# Altium PCB R45_PCBM.PcbDoc (part 2 of 8)
Units mm, origin at the board's own origin, x right, y up, seen from the top; angles counter-clockwise.
Board outline 109 x 109 mm, 4 copper layers (Top Layer, Layer 1, Layer 2, Bottom Layer), stack 0.98 mm thick; 9 components, 0 nets, 14 pads, 1504 vias.
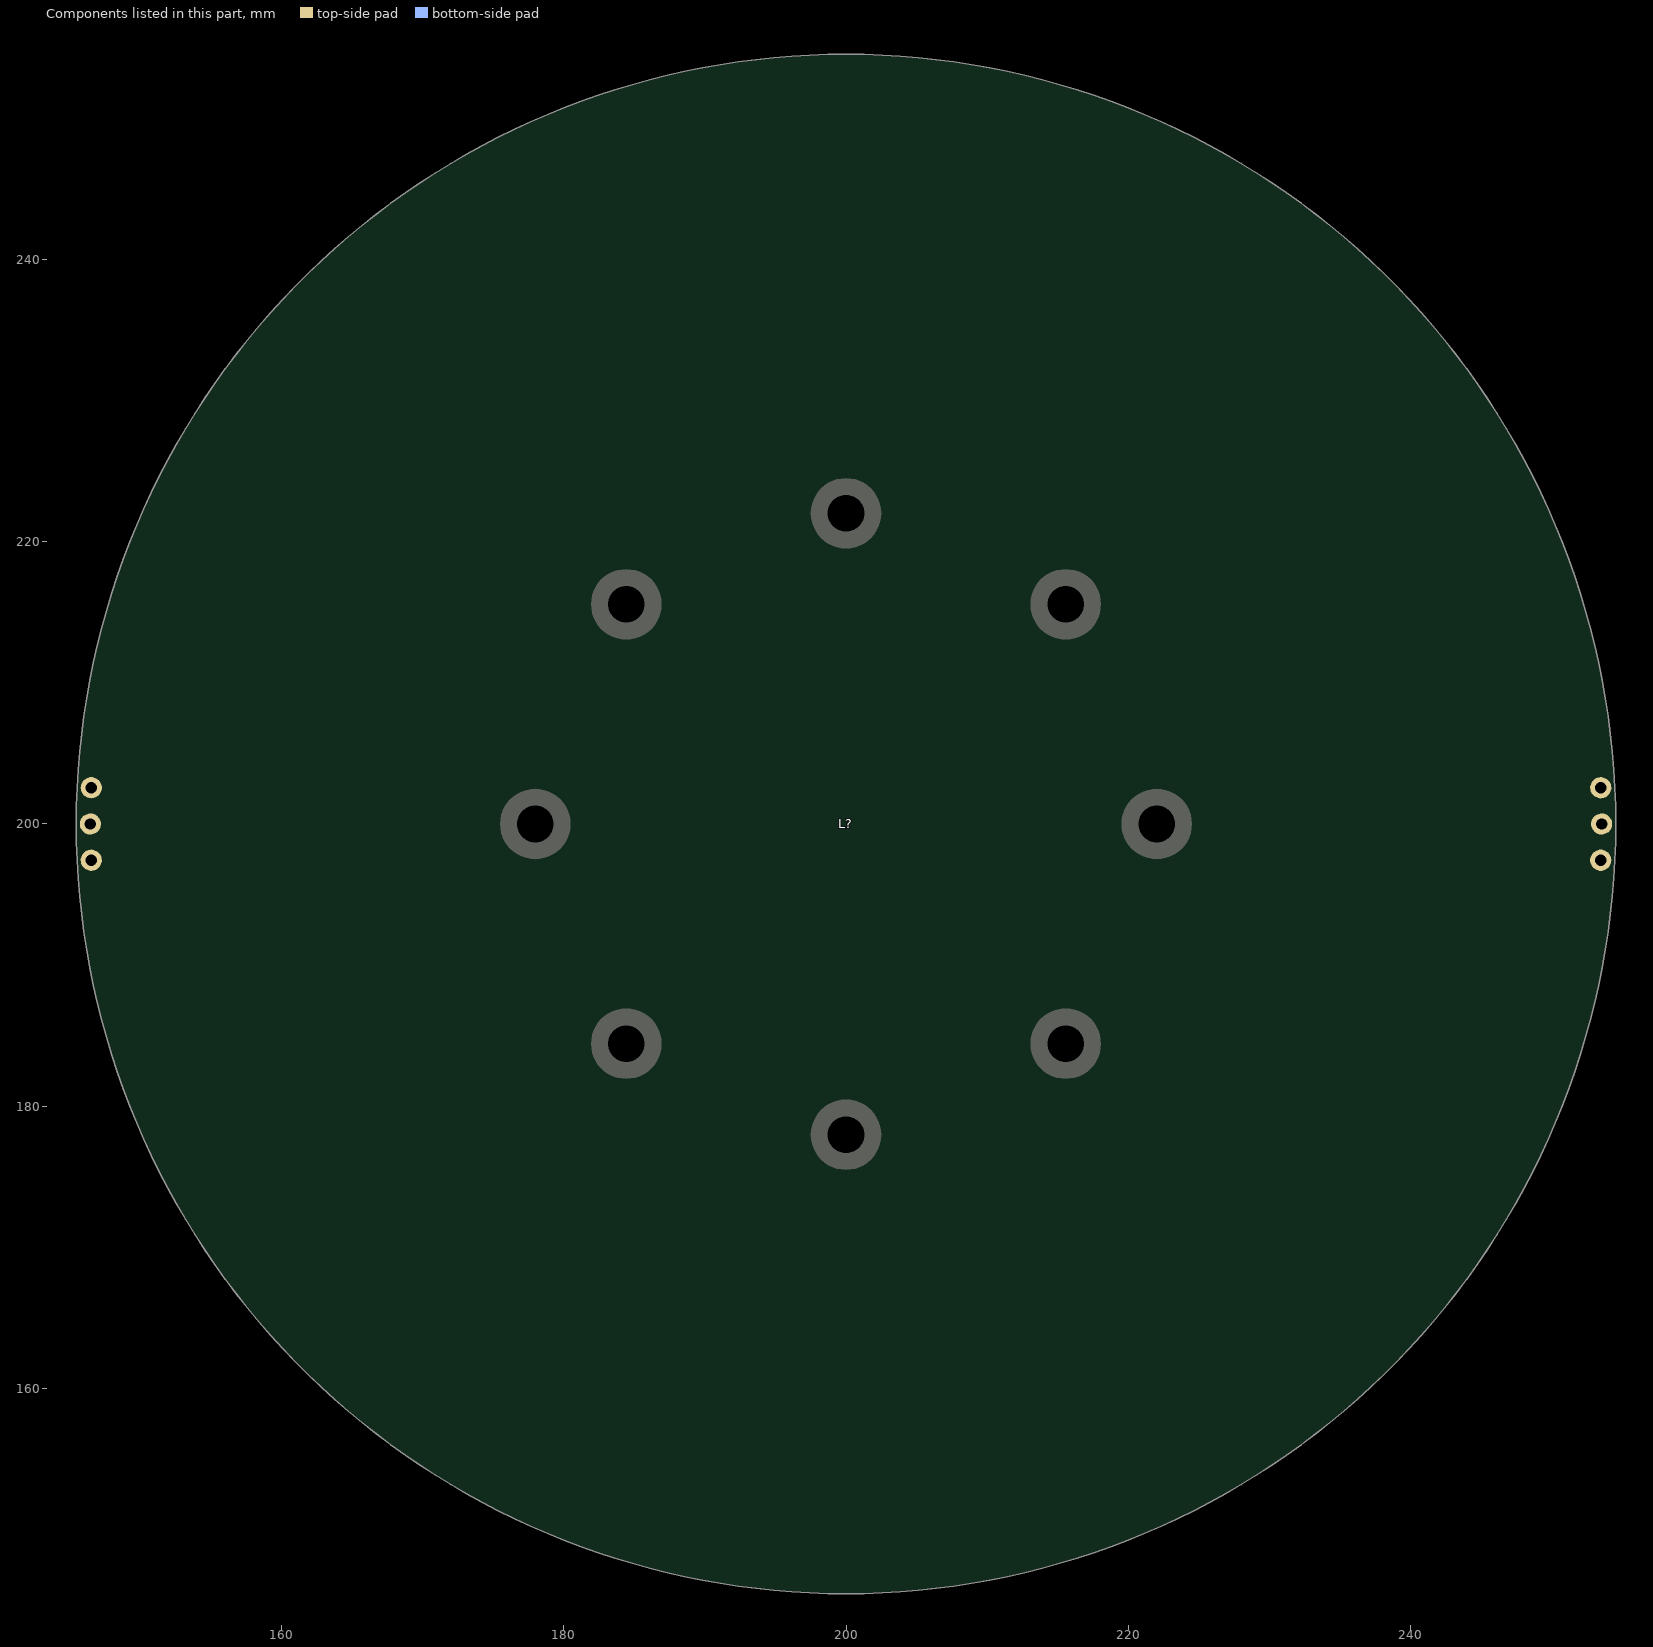
[diagram p4: the components of this part, seen from the top]

## Footprints (in the part's own frame and the unit in brackets; to place one, negate y for a bottom-side part, rotate by r counter-clockwise, add the part's x,y. Pads: shape width x height; smd on the part's side, far side on the other; paste and mask are expansions set on the pad) (continued)
R45_stator [mm]
  round 1.5 hole 0.8 paste-2539.97 mask+0.102: A(53.385,-3.499) A'(-53.386,3.499) B(53.492,-0.934) B'(-53.492,0.934) C(53.475,1.634) C'(-53.476,-1.634)
  Top Layer region: -34.464,30.464 -34.494,30.413 -34.502,30.355 -34.487,30.298 -34.451,30.251 -34.451,30.251 -21.846,19.3 -21.81,19.253 -21.795,19.197 -21.802,19.139 -21.831,19.088 -21.831,19.088 -21.94,18.962 -21.987,18.926 -22.043,18.911 -22.101,18.918 -22.152,18.947 -22.152,18.947 -34.751,29.906 -34.802,29.935 -34.861,29.942 -34.918,29.926 -34.964,29.889 -34.964,29.889 -35.506,29.243 -35.535,29.191 -35.541,29.132 -35.524,29.075 -35.486,29.03 -35.486,29.03 -21.799,17.953 -21.73,17.921 -21.654,17.928 -21.591,17.971 -21.591,17.971 -20.801,18.88 -20.767,18.948 -20.771,19.024 -20.812,19.088 -20.812,19.088 -33.686,31.1 -33.736,31.131 -33.795,31.14 -33.852,31.126 -33.9,31.091 -33.9,31.091
  Top Layer region: -30.464,34.464 -31.091,33.9 -31.126,33.852 -31.14,33.795 -31.131,33.736 -31.1,33.686 -31.1,33.686 -19.707,21.475 -19.642,21.435 -19.565,21.431 -19.497,21.466 -19.497,21.466 -19.311,21.634 -19.269,21.698 -19.264,21.775 -19.298,21.844 -19.298,21.844 -30.251,34.451 -30.298,34.487 -30.355,34.502 -30.413,34.494 -30.464,34.464
  Top Layer region: -32.794,32.255 -33.38,31.648 -33.412,31.599 -33.422,31.54 -33.409,31.483 -33.374,31.435 -33.374,31.435 -21.157,20.048 -21.09,20.012 -21.013,20.014 -20.947,20.054 -20.947,20.054 -20.773,20.234 -20.735,20.302 -20.736,20.378 -20.775,20.445 -20.775,20.445 -32.58,32.257 -32.629,32.29 -32.688,32.301 -32.745,32.289 -32.794,32.255
  Top Layer region: -35.986,28.65 -36.505,27.986 -36.532,27.933 -36.536,27.874 -36.517,27.818 -36.477,27.774 -36.477,27.774 -23.137,17.727 -23.066,17.698 -22.99,17.708 -22.929,17.755 -22.929,17.755 -22.774,17.952 -22.744,18.023 -22.753,18.099 -22.798,18.161 -22.798,18.161 -35.773,28.675 -35.826,28.702 -35.885,28.707 -35.941,28.689 -35.986,28.65
  Top Layer region: -31.648,33.38 -32.255,32.794 -32.289,32.745 -32.301,32.688 -32.29,32.629 -32.257,32.58 -32.257,32.58 -20.34,20.67 -20.239,20.519 -20.204,20.34 -20.239,20.162 -20.341,20.01 -20.341,20.01 -20.453,19.841 -20.49,19.64 -20.446,19.441 -20.328,19.275 -20.328,19.275 -20.277,19.228 -20.195,19.099 -20.188,18.948 -20.255,18.812 -20.255,18.812 -21.447,17.44 -21.573,17.354 -21.724,17.341 -21.863,17.403 -21.863,17.403 -21.917,17.447 -22.098,17.541 -22.301,17.557 -22.494,17.493 -22.647,17.358 -22.647,17.358 -22.782,17.236 -22.954,17.176 -23.136,17.187 -23.3,17.266 -23.3,17.266 -36.752,27.409 -36.806,27.434 -36.865,27.437 -36.92,27.417 -36.964,27.377 -36.964,27.377 -37.46,26.695 -37.484,26.641 -37.486,26.582 -37.465,26.527 -37.424,26.484 -37.424,26.484 -21.96,15.662 -21.892,15.636 -21.82,15.645 -21.761,15.686 -21.761,15.686 -18.562,19.366 -18.529,19.43 -18.53,19.503 -18.566,19.566 -18.566,19.566 -31.435,33.374 -31.483,33.409 -31.54,33.422 -31.599,33.412 -31.648,33.38
  Top Layer region: -29.243,35.506 -29.889,34.964 -29.926,34.918 -29.942,34.861 -29.935,34.802 -29.906,34.751 -29.906,34.751 -18.849,22.039 -18.759,21.881 -18.736,21.7 -18.784,21.525 -18.895,21.381 -18.895,21.381 -19.019,21.219 -19.07,21.022 -19.04,20.82 -18.934,20.646 -18.934,20.646 -18.036,19.684 -17.965,19.557 -17.963,19.412 -18.029,19.283 -18.029,19.283 -21.604,15.17 -21.723,15.086 -21.867,15.069 -22.003,15.121 -22.003,15.121 -23.08,15.876 -23.267,15.957 -23.471,15.959 -23.659,15.881 -23.802,15.736 -23.802,15.736 -23.929,15.605 -24.097,15.533 -24.279,15.531 -24.448,15.598 -24.448,15.598 -38.575,24.778 -38.63,24.8 -38.689,24.799 -38.743,24.775 -38.784,24.732 -38.784,24.732 -39.231,24.017 -39.251,23.961 -39.249,23.902 -39.224,23.849 -39.181,23.809 -39.181,23.809 -22.01,13.498 -21.944,13.477 -21.876,13.488 -21.82,13.528 -21.82,13.528 -16.434,19.725 -16.401,19.786 -16.4,19.855 -16.43,19.917 -16.43,19.917 -29.03,35.486 -29.075,35.524 -29.132,35.541 -29.191,35.535 -29.243,35.506
  Top Layer region: -37.897,26.07 -38.369,25.371 -38.391,25.317 -38.391,25.258 -38.368,25.203 -38.326,25.162 -38.326,25.162 -24.317,16.07 -24.244,16.046 -24.169,16.061 -24.111,16.112 -24.111,16.112 -23.971,16.32 -23.946,16.392 -23.96,16.468 -24.009,16.527 -24.009,16.527 -37.687,26.109 -37.741,26.133 -37.8,26.134 -37.855,26.112 -37.897,26.07
  Top Layer region: 15.335,-43.367 16.128,-43.078 16.178,-43.047 16.213,-43 16.227,-42.942 16.217,-42.884 16.217,-42.884 10.227,-27.294 10.182,-27.232 10.113,-27.2 10.036,-27.207 10.036,-27.207 9.8,-27.293 9.737,-27.337 9.704,-27.406 9.71,-27.483 9.71,-27.483 15.142,-43.275 15.172,-43.326 15.22,-43.361 15.277,-43.376 15.335,-43.367
  Top Layer region: 17.941,-45.68 17.883,-45.691 17.825,-45.678 17.777,-45.644 17.746,-45.594 17.746,-45.594 9.752,-24.752 9.743,-24.682 9.767,-24.615 9.819,-24.567 9.819,-24.567 15.631,-21.346 15.699,-21.327 15.768,-21.342 15.823,-21.387 15.823,-21.387 27.409,-36.752 27.434,-36.806 27.437,-36.865 27.417,-36.92 27.377,-36.964 27.377,-36.964 26.695,-37.46 26.641,-37.484 26.582,-37.486 26.527,-37.465 26.484,-37.424 26.484,-37.424 16.824,-23.621 16.693,-23.495 16.523,-23.429 16.341,-23.433 16.174,-23.506 16.174,-23.506 15.987,-23.588 15.784,-23.589 15.595,-23.511 15.453,-23.366 15.453,-23.366 15.187,-22.956 15.077,-22.856 14.933,-22.82 14.79,-22.857 14.79,-22.857 11.547,-24.655 11.439,-24.757 11.393,-24.898 11.42,-25.044 11.42,-25.044 11.627,-25.487 11.675,-25.685 11.641,-25.886 11.531,-26.058 11.363,-26.173 11.363,-26.173 11.213,-26.276 11.113,-26.428 11.079,-26.607 11.116,-26.785 11.116,-26.785 18.439,-44.023 18.505,-44.119 18.603,-44.184 18.718,-44.205 18.833,-44.181 18.833,-44.181 22.548,-42.406 26.097,-40.319 26.097,-40.319 26.181,-40.237 26.227,-40.13 26.229,-40.012 26.186,-39.904 26.186,-39.904 16.07,-24.317 16.046,-24.244 16.061,-24.169 16.112,-24.111 16.112,-24.111 16.32,-23.971 16.392,-23.946 16.468,-23.96 16.527,-24.009 16.527,-24.009 27.876,-40.208 27.9,-40.262 27.901,-40.321 27.879,-40.375 27.838,-40.418 27.838,-40.418 23.04,-43.332 17.941,-45.68
  Top Layer region: 18.92,-43.601 18.862,-43.613 18.804,-43.603 18.755,-43.571 18.722,-43.522 18.722,-43.522 11.603,-26.738 11.592,-26.662 11.62,-26.591 11.68,-26.543 11.68,-26.543 11.909,-26.441 11.985,-26.428 12.057,-26.455 12.106,-26.514 12.106,-26.514 19.33,-41.995 19.4,-42.089 19.5,-42.15 19.616,-42.168 19.73,-42.14 19.73,-42.14 21.844,-41.083 23.903,-39.921 23.903,-39.921 23.99,-39.842 24.04,-39.736 24.045,-39.619 24.006,-39.509 24.006,-39.509 15.058,-24.607 14.949,-24.501 14.802,-24.462 14.655,-24.499 14.655,-24.499 13.011,-25.411 12.901,-25.516 12.856,-25.661 12.889,-25.81 12.889,-25.81 20.61,-40.954 20.626,-41.01 20.619,-41.069 20.59,-41.121 20.542,-41.156 20.542,-41.156 19.785,-41.526 19.727,-41.541 19.669,-41.533 19.618,-41.502 19.583,-41.455 19.583,-41.455 11.965,-25.105 11.951,-25.032 11.974,-24.962 12.028,-24.911 12.028,-24.911 14.752,-23.401 14.824,-23.382 14.896,-23.4 14.95,-23.45 14.95,-23.45 25.612,-39.858 25.634,-39.913 25.633,-39.972 25.61,-40.026 25.567,-40.066 25.567,-40.066 22.313,-41.966 18.92,-43.601
  Top Layer region: 21.222,-40.81 21.966,-40.414 22.012,-40.377 22.04,-40.325 22.045,-40.266 22.027,-40.209 22.027,-40.209 13.926,-25.605 13.873,-25.55 13.8,-25.528 13.725,-25.545 13.725,-25.545 13.503,-25.663 13.447,-25.715 13.424,-25.789 13.44,-25.864 13.44,-25.864 21.018,-40.746 21.054,-40.792 21.106,-40.821 21.165,-40.827 21.222,-40.81
  Top Layer region: 27.986,-36.505 27.933,-36.532 27.874,-36.536 27.818,-36.517 27.774,-36.477 27.774,-36.477 17.727,-23.137 17.698,-23.066 17.708,-22.99 17.755,-22.929 17.755,-22.929 17.952,-22.774 18.023,-22.744 18.099,-22.753 18.161,-22.798 18.161,-22.798 28.675,-35.773 28.702,-35.826 28.707,-35.885 28.689,-35.941 28.65,-35.986 28.65,-35.986
  Top Layer region: 22.633,-40.045 23.363,-39.623 23.408,-39.584 23.434,-39.531 23.437,-39.472 23.417,-39.416 23.417,-39.416 14.812,-25.103 14.756,-25.05 14.682,-25.031 14.608,-25.051 14.608,-25.051 14.391,-25.176 14.336,-25.231 14.316,-25.304 14.334,-25.379 14.334,-25.379 22.427,-39.988 22.465,-40.033 22.518,-40.06 22.577,-40.064 22.633,-40.045
  Top Layer region: 7.572,-45.371 8.402,-45.224 8.458,-45.203 8.5,-45.162 8.523,-45.107 8.524,-45.048 8.524,-45.048 5.332,-28.655 5.299,-28.586 5.236,-28.543 5.159,-28.536 5.159,-28.536 4.912,-28.58 4.842,-28.612 4.798,-28.675 4.79,-28.751 4.79,-28.751 7.398,-45.247 7.418,-45.302 7.459,-45.345 7.513,-45.369 7.572,-45.371
  Top Layer region: 1.235,-49.061 1.177,-49.051 1.128,-49.02 1.094,-48.972 1.082,-48.914 1.082,-48.914 0.698,-26.595 0.714,-26.526 0.759,-26.471 0.825,-26.444 0.825,-26.444 7.387,-25.405 7.458,-25.41 7.518,-25.448 7.554,-25.509 7.554,-25.509 13.186,-43.91 13.192,-43.969 13.174,-44.026 13.136,-44.071 13.084,-44.098 13.084,-44.098 12.273,-44.331 12.214,-44.336 12.158,-44.317 12.113,-44.278 12.087,-44.225 12.087,-44.225 7.731,-27.951 7.65,-27.787 7.513,-27.667 7.341,-27.609 7.159,-27.621 7.159,-27.621 6.956,-27.633 6.764,-27.565 6.613,-27.427 6.529,-27.242 6.529,-27.242 6.419,-26.766 6.351,-26.634 6.228,-26.551 6.08,-26.537 6.08,-26.537 2.418,-27.117 2.282,-27.176 2.19,-27.293 2.166,-27.44 2.166,-27.44 2.209,-27.926 2.186,-28.129 2.085,-28.306 1.924,-28.43 1.726,-28.481 1.726,-28.481 1.55,-28.526 1.404,-28.635 1.311,-28.791 1.285,-28.972 1.285,-28.972 2.27,-47.674 2.299,-47.788 2.369,-47.881 2.47,-47.941 2.586,-47.958 2.586,-47.958 6.684,-47.56 10.733,-46.813 10.733,-46.813 10.84,-46.765 10.92,-46.68 10.962,-46.57 10.959,-46.453 10.959,-46.453 6.784,-28.347 6.786,-28.27 6.826,-28.205 6.894,-28.168 6.894,-28.168 7.137,-28.107 7.214,-28.108 7.28,-28.147 7.318,-28.214 7.318,-28.214 12.443,-47.317 12.447,-47.376 12.428,-47.432 12.389,-47.476 12.336,-47.501 12.336,-47.501 6.83,-48.599 1.235,-49.061
  Top Layer region: 2.866,-47.442 2.808,-47.434 2.757,-47.405 2.722,-47.358 2.707,-47.301 2.707,-47.301 1.758,-29.094 1.774,-29.019 1.825,-28.962 1.898,-28.937 1.898,-28.937 2.148,-28.919 2.223,-28.934 2.282,-28.984 2.308,-29.056 2.308,-29.056 3.802,-46.074 3.834,-46.186 3.908,-46.277 4.011,-46.334 4.127,-46.346 4.127,-46.346 6.476,-46.077 8.808,-45.688 8.808,-45.688 8.916,-45.644 8.999,-45.562 9.045,-45.454 9.045,-45.337 9.045,-45.337 5.733,-28.273 5.668,-28.136 5.543,-28.049 5.392,-28.034 5.392,-28.034 3.535,-28.328 3.396,-28.389 3.304,-28.511 3.284,-28.661 3.284,-28.661 5.36,-45.533 5.356,-45.592 5.329,-45.645 5.284,-45.683 5.227,-45.7 5.227,-45.7 4.389,-45.789 4.33,-45.783 4.277,-45.755 4.24,-45.709 4.223,-45.652 4.223,-45.652 2.657,-27.683 2.669,-27.61 2.714,-27.552 2.782,-27.522 2.782,-27.522 5.859,-27.035 5.932,-27.042 5.994,-27.083 6.028,-27.149 6.028,-27.149 10.435,-46.214 10.437,-46.273 10.416,-46.328 10.376,-46.371 10.322,-46.395 10.322,-46.395 6.615,-47.066 2.866,-47.442
  Top Layer region: 5.984,-45.607 6.819,-45.49 6.875,-45.47 6.919,-45.431 6.944,-45.377 6.946,-45.318 6.946,-45.318 4.329,-28.824 4.298,-28.754 4.236,-28.708 4.16,-28.699 4.16,-28.699 3.912,-28.734 3.841,-28.764 3.794,-28.825 3.784,-28.901 3.784,-28.901 5.814,-45.477 5.833,-45.533 5.872,-45.578 5.925,-45.604 5.984,-45.607
  Top Layer region: 13.813,-43.875 13.754,-43.882 13.697,-43.866 13.651,-43.829 13.623,-43.777 13.623,-43.777 8.745,-27.805 8.742,-27.728 8.777,-27.66 8.842,-27.618 8.842,-27.618 9.08,-27.541 9.157,-27.536 9.226,-27.571 9.269,-27.634 9.269,-27.634 14.71,-43.423 14.718,-43.482 14.703,-43.539 14.666,-43.586 14.615,-43.615 14.615,-43.615
  Top Layer region: -0.422,-45.996 0.422,-45.996 0.48,-45.985 0.529,-45.952 0.561,-45.902 0.572,-45.844 0.572,-45.844 0.275,-29.146 0.254,-29.072 0.2,-29.018 0.125,-28.999 0.125,-28.999 -0.125,-28.999 -0.2,-29.018 -0.254,-29.072 -0.275,-29.146 -0.275,-29.146 -0.572,-45.844 -0.561,-45.902 -0.529,-45.952 -0.48,-45.985 -0.422,-45.996
  Top Layer region: 45.224,-8.402 45.371,-7.572 45.369,-7.513 45.345,-7.459 45.302,-7.418 45.247,-7.398 45.247,-7.398 28.751,-4.79 28.675,-4.798 28.612,-4.842 28.58,-4.912 28.58,-4.912 28.536,-5.159 28.543,-5.236 28.586,-5.299 28.655,-5.332 28.655,-5.332 45.048,-8.524 45.107,-8.523 45.162,-8.5 45.203,-8.458 45.224,-8.402
  Top Layer region: 48.531,-7.303 48.511,-7.358 48.471,-7.402 48.418,-7.426 48.359,-7.429 48.359,-7.429 26.312,-3.931 26.247,-3.903 26.201,-3.849 26.186,-3.78 26.186,-3.78 26.302,2.864 26.319,2.932 26.367,2.985 26.433,3.01 26.433,3.01 45.533,5.36 45.592,5.356 45.645,5.329 45.683,5.284 45.7,5.227 45.7,5.227 45.789,4.389 45.783,4.33 45.755,4.277 45.709,4.24 45.652,4.223 45.652,4.223 28.868,2.76 28.694,2.709 28.552,2.595 28.464,2.435 28.444,2.254 28.444,2.254 28.421,2.052 28.321,1.874 28.159,1.75 27.962,1.699 27.962,1.699 27.474,1.674 27.332,1.63 27.229,1.523 27.19,1.38 27.19,1.38 27.125,-2.328 27.159,-2.472 27.259,-2.583 27.399,-2.632 27.399,-2.632 27.886,-2.674 28.081,-2.732 28.238,-2.862 28.332,-3.042 28.348,-3.246 28.348,-3.246 28.362,-3.427 28.444,-3.59 28.582,-3.709 28.754,-3.766 28.754,-3.766 47.344,-6.043 47.461,-6.034 47.565,-5.981 47.642,-5.892 47.678,-5.781 47.678,-5.781 47.998,-1.676 47.965,2.441 47.965,2.441 47.937,2.555 47.867,2.649 47.766,2.709 47.65,2.726 47.65,2.726 29.094,1.758 29.019,1.774 28.962,1.825 28.937,1.898 28.937,1.898 28.919,2.148 28.934,2.223 28.984,2.282 29.056,2.308 29.056,2.308 48.759,4.037 48.818,4.031 48.869,4.002 48.906,3.956 48.922,3.9 48.922,3.9 49.047,-1.713 48.531,-7.303
  Top Layer region: 47.219,-5.416 47.201,-5.472 47.163,-5.516 47.111,-5.543 47.052,-5.547 47.052,-5.547 28.958,-3.321 28.886,-3.292 28.839,-3.232 28.827,-3.156 28.827,-3.156 28.853,-2.906 28.88,-2.835 28.94,-2.786 29.015,-2.773 29.015,-2.773 46.034,-4.257 46.15,-4.244 46.253,-4.188 46.326,-4.096 46.359,-3.984 46.359,-3.984 46.501,-1.624 46.524,0.74 46.524,0.74 46.499,0.855 46.432,0.951 46.334,1.014 46.219,1.035 46.219,1.035 28.839,0.737 28.693,0.696 28.586,0.588 28.545,0.442 28.545,0.442 28.512,-1.438 28.548,-1.586 28.651,-1.697 28.796,-1.743 28.796,-1.743 45.772,-2.628 45.829,-2.642 45.876,-2.678 45.906,-2.729 45.914,-2.788 45.914,-2.788 45.855,-3.629 45.839,-3.686 45.803,-3.733 45.751,-3.762 45.692,-3.768 45.692,-3.768 27.724,-2.191 27.654,-2.166 27.604,-2.111 27.587,-2.039 27.587,-2.039 27.642,1.075 27.661,1.147 27.713,1.2 27.784,1.222 27.784,1.222 47.324,2.252 47.383,2.243 47.433,2.213 47.468,2.166 47.482,2.109 47.482,2.109 47.5,-1.659 47.219,-5.416
  Top Layer region: 45.954,-2.027 45.983,-1.184 45.973,-1.125 45.942,-1.075 45.894,-1.041 45.836,-1.029 45.836,-1.029 29.138,-0.742 29.063,-0.76 29.008,-0.813 28.985,-0.887 28.985,-0.887 28.977,-1.137 28.994,-1.212 29.046,-1.269 29.119,-1.292 29.119,-1.292 45.796,-2.171 45.854,-2.163 45.905,-2.132 45.94,-2.084 45.954,-2.027
  Top Layer region: 45.607,5.984 45.604,5.925 45.578,5.872 45.533,5.833 45.477,5.814 45.477,5.814 28.901,3.784 28.825,3.794 28.764,3.841 28.734,3.912 28.734,3.912 28.699,4.16 28.708,4.236 28.754,4.298 28.824,4.329 28.824,4.329 45.318,6.946 45.377,6.944 45.431,6.919 45.47,6.875 45.49,6.819 45.49,6.819
  Top Layer region: 45.996,-0.422 45.996,0.422 45.985,0.48 45.952,0.529 45.902,0.561 45.844,0.572 45.844,0.572 29.146,0.275 29.072,0.254 29.018,0.2 28.999,0.125 28.999,0.125 28.999,-0.125 29.018,-0.2 29.072,-0.254 29.146,-0.275 29.146,-0.275 45.844,-0.572 45.902,-0.561 45.952,-0.529 45.985,-0.48 45.996,-0.422
  Top Layer region: 45.371,7.572 45.224,8.402 45.203,8.458 45.162,8.5 45.107,8.523 45.048,8.524 45.048,8.524 28.655,5.332 28.586,5.299 28.543,5.236 28.536,5.159 28.536,5.159 28.58,4.912 28.612,4.842 28.675,4.798 28.751,4.79 28.751,4.79 45.247,7.398 45.302,7.418 45.345,7.459 45.369,7.513 45.371,7.572
  Top Layer region: 48.102,9.736 48.102,9.677 48.079,9.623 48.038,9.581 47.983,9.559 47.983,9.559 26.07,5.306 25.999,5.309 25.937,5.345 25.899,5.404 25.899,5.404 23.736,11.687 23.729,11.757 23.756,11.823 23.81,11.869 23.81,11.869 40.954,20.61 41.01,20.626 41.069,20.619 41.121,20.59 41.156,20.542 41.156,20.542 41.526,19.785 41.541,19.727 41.533,19.669 41.502,19.618 41.455,19.583 41.455,19.583 26.183,12.467 26.037,12.359 25.942,12.204 25.915,12.024 25.958,11.847 25.958,11.847 26.005,11.649 25.972,11.448 25.862,11.276 25.694,11.16 25.694,11.16 25.245,10.97 25.127,10.88 25.066,10.744 25.078,10.596 25.078,10.596 26.285,7.09 26.367,6.966 26.498,6.896 26.647,6.898 26.647,6.898 27.118,7.025 27.322,7.037 27.514,6.969 27.664,6.831 27.749,6.646 27.749,6.646 27.823,6.48 27.956,6.355 28.126,6.29 28.308,6.296 28.308,6.296 46.556,10.514 46.662,10.562 46.743,10.648 46.784,10.757 46.78,10.874 46.78,10.874 45.677,14.841 44.238,18.699 44.238,18.699 44.172,18.796 44.074,18.86 43.959,18.882 43.844,18.859 43.844,18.859 26.738,11.603 26.662,11.592 26.591,11.62 26.543,11.68 26.543,11.68 26.441,11.909 26.428,11.985 26.455,12.057 26.514,12.106 26.514,12.106 44.438,20.47 44.495,20.484 44.553,20.475 44.603,20.445 44.638,20.397 44.638,20.397 46.675,15.166 48.102,9.736
  Top Layer region: 46.224,11.061 46.226,11.002 46.206,10.947 46.165,10.904 46.112,10.88 46.112,10.88 28.347,6.784 28.27,6.786 28.205,6.826 28.168,6.894 28.168,6.894 28.107,7.137 28.108,7.214 28.147,7.28 28.214,7.318 28.214,7.318 44.714,11.744 44.819,11.796 44.896,11.884 44.933,11.995 44.926,12.112 44.926,12.112 44.252,14.378 43.465,16.607 43.465,16.607 43.403,16.707 43.307,16.774 43.193,16.8 43.077,16.781 43.077,16.781 26.848,10.556 26.725,10.467 26.66,10.33 26.672,10.178 26.672,10.178 27.284,8.4 27.368,8.274 27.504,8.205 27.656,8.211 27.656,8.211 43.91,13.186 43.969,13.192 44.026,13.174 44.071,13.136 44.098,13.084 44.098,13.084 44.331,12.273 44.336,12.214 44.317,12.158 44.278,12.113 44.225,12.087 44.225,12.087 26.801,7.423 26.727,7.422 26.662,7.457 26.621,7.519 26.621,7.519 25.607,10.464 25.601,10.538 25.631,10.606 25.69,10.651 25.69,10.651 43.7,18.302 43.758,18.314 43.816,18.303 43.865,18.27 43.897,18.221 43.897,18.221 45.203,14.687 46.224,11.061
  Top Layer region: 43.875,13.813 43.615,14.615 43.586,14.666 43.539,14.703 43.482,14.718 43.423,14.71 43.423,14.71 27.634,9.269 27.571,9.226 27.536,9.157 27.541,9.08 27.541,9.08 27.618,8.842 27.66,8.777 27.728,8.742 27.805,8.745 27.805,8.745 43.777,13.623 43.829,13.651 43.866,13.697 43.882,13.754 43.875,13.813
  Top Layer region: 40.81,21.222 40.827,21.165 40.821,21.106 40.792,21.054 40.746,21.018 40.746,21.018 25.864,13.44 25.789,13.424 25.715,13.447 25.663,13.503 25.663,13.503 25.545,13.725 25.528,13.8 25.55,13.873 25.605,13.926 25.605,13.926 40.209,22.027 40.266,22.045 40.325,22.04 40.377,22.012 40.414,21.966 40.414,21.966
  Top Layer region: 43.367,15.335 43.078,16.128 43.047,16.178 43,16.213 42.942,16.227 42.884,16.217 42.884,16.217 27.294,10.227 27.232,10.182 27.2,10.113 27.207,10.036 27.207,10.036 27.293,9.8 27.337,9.737 27.406,9.704 27.483,9.71 27.483,9.71 43.275,15.142 43.326,15.172 43.361,15.22 43.376,15.277 43.367,15.335
  Top Layer region: 43.078,-16.128 43.367,-15.335 43.376,-15.277 43.361,-15.22 43.326,-15.172 43.275,-15.142 43.275,-15.142 27.483,-9.71 27.406,-9.704 27.337,-9.737 27.293,-9.8 27.293,-9.8 27.207,-10.036 27.2,-10.113 27.232,-10.182 27.294,-10.227 27.294,-10.227 42.884,-16.217 42.942,-16.227 43,-16.213 43.047,-16.178 43.078,-16.128
  Top Layer region: 43.106,-23.461 43.068,-23.506 43.016,-23.533 42.958,-23.538 42.902,-23.52 42.902,-23.52 23.381,-12.693 23.329,-12.645 23.305,-12.578 23.314,-12.508 23.314,-12.508 25.695,-6.305 25.735,-6.246 25.798,-6.213 25.868,-6.212 25.868,-6.212 44.62,-10.536 44.674,-10.56 44.714,-10.604 44.735,-10.659 44.732,-10.718 44.732,-10.718 44.528,-11.537 44.503,-11.59 44.459,-11.63 44.403,-11.649 44.344,-11.645 44.344,-11.645 28.071,-7.28 27.89,-7.268 27.717,-7.327 27.58,-7.447 27.5,-7.61 27.5,-7.61 27.409,-7.793 27.254,-7.925 27.06,-7.986 26.857,-7.967 26.857,-7.967 26.39,-7.824 26.241,-7.817 26.108,-7.882 26.022,-8.003 26.022,-8.003 24.693,-11.465 24.676,-11.612 24.732,-11.75 24.846,-11.844 24.846,-11.844 25.289,-12.05 25.453,-12.171 25.557,-12.347 25.583,-12.549 25.529,-12.745 25.529,-12.745 25.479,-12.921 25.5,-13.102 25.589,-13.26 25.732,-13.373 25.732,-13.373 42.422,-21.871 42.535,-21.903 42.651,-21.889 42.753,-21.832 42.826,-21.739 42.826,-21.739 44.53,-17.991 45.908,-14.111 45.908,-14.111 45.92,-13.995 45.886,-13.882 45.812,-13.792 45.709,-13.736 45.709,-13.736 27.941,-8.299 27.876,-8.258 27.839,-8.191 27.841,-8.114 27.841,-8.114 27.91,-7.873 27.949,-7.807 28.016,-7.769 28.093,-7.769 28.093,-7.769 47.199,-12.883 47.252,-12.909 47.291,-12.953 47.31,-13.009 47.305,-13.068 47.305,-13.068 45.503,-18.385 43.106,-23.461
  Top Layer region: 42.519,-21.239 42.483,-21.285 42.432,-21.314 42.374,-21.322 42.317,-21.306 42.317,-21.306 26.076,-13.024 26.018,-12.973 25.994,-12.9 26.009,-12.825 26.009,-12.825 26.119,-12.599 26.169,-12.541 26.241,-12.516 26.317,-12.529 26.317,-12.529 41.802,-19.745 41.916,-19.772 42.031,-19.754 42.131,-19.694 42.201,-19.599 42.201,-19.599 43.142,-17.43 43.971,-15.217 43.971,-15.217 43.987,-15.101 43.957,-14.987 43.887,-14.894 43.785,-14.835 43.785,-14.835 27.352,-9.171 27.201,-9.16 27.063,-9.224 26.974,-9.347 26.974,-9.347 26.3,-11.103 26.284,-11.254 26.343,-11.394 26.463,-11.487 26.463,-11.487 42.113,-18.124 42.162,-18.158 42.194,-18.207 42.204,-18.265 42.191,-18.323 42.191,-18.323 41.848,-19.094 41.814,-19.142 41.764,-19.173 41.705,-19.182 41.648,-19.169 41.648,-19.169 25.303,-11.541 25.245,-11.494 25.217,-11.425 25.226,-11.351 25.226,-11.351 26.342,-8.444 26.385,-8.383 26.452,-8.351 26.526,-8.354 26.526,-8.354 45.241,-14.07 45.292,-14.098 45.329,-14.144 45.346,-14.2 45.34,-14.258 45.34,-14.258 44.068,-17.805 42.519,-21.239
  Top Layer region: 42.489,-17.622 42.805,-16.84 42.816,-16.781 42.804,-16.724 42.77,-16.675 42.72,-16.643 42.72,-16.643 27.127,-10.663 27.051,-10.655 26.98,-10.685 26.934,-10.747 26.934,-10.747 26.84,-10.979 26.831,-11.056 26.86,-11.127 26.921,-11.174 26.921,-11.174 42.291,-17.703 42.349,-17.715 42.407,-17.704 42.457,-17.671 42.489,-17.622
  Top Layer region: 44.904,-9.976 44.88,-10.03 44.837,-10.071 44.782,-10.092 44.723,-10.091 44.723,-10.091 28.452,-6.329 28.384,-6.293 28.343,-6.229 28.339,-6.152 28.339,-6.152 28.391,-5.906 28.426,-5.838 28.49,-5.796 28.566,-5.79 28.566,-5.79 44.961,-8.972 45.016,-8.995 45.057,-9.037 45.08,-9.092 45.079,-9.151 45.079,-9.151
  Top Layer region: 39.623,-23.363 40.045,-22.633 40.064,-22.577 40.06,-22.518 40.033,-22.465 39.988,-22.427 39.988,-22.427 25.379,-14.334 25.304,-14.316 25.231,-14.336 25.176,-14.391 25.176,-14.391 25.051,-14.608 25.031,-14.682 25.05,-14.756 25.104,-14.812 25.103,-14.812 39.416,-23.417 39.472,-23.437 39.531,-23.434 39.584,-23.408 39.623,-23.363
  Top Layer region: 30.59,38.377 30.628,38.332 30.645,38.276 30.64,38.218 30.613,38.166 30.613,38.166 16.56,20.822 16.504,20.779 16.434,20.766 16.366,20.787 16.366,20.787 10.671,24.21 10.62,24.259 10.599,24.327 10.61,24.397 10.61,24.397 18.124,42.113 18.158,42.162 18.207,42.194 18.265,42.204 18.323,42.191 18.323,42.191 19.094,41.848 19.142,41.814 19.173,41.764 19.182,41.705 19.169,41.648 19.169,41.648 12.044,26.381 12.001,26.204 12.029,26.024 12.123,25.868 12.27,25.761 12.27,25.761 12.434,25.639 12.537,25.464 12.564,25.262 12.509,25.065 12.509,25.065 12.287,24.63 12.255,24.485 12.296,24.342 12.4,24.237 12.4,24.237 15.578,22.327 15.721,22.285 15.866,22.315 15.979,22.412 15.979,22.412 16.259,22.813 16.406,22.953 16.597,23.024 16.801,23.015 16.985,22.928 16.985,22.928 17.149,22.848 17.331,22.838 17.503,22.898 17.638,23.019 17.638,23.019 28.905,37.98 28.956,38.085 28.963,38.202 28.924,38.313 28.846,38.4 28.846,38.4 25.451,40.73 21.869,42.76 21.869,42.76 21.756,42.792 21.64,42.778 21.537,42.721 21.465,42.629 21.465,42.629 13.024,26.076 12.973,26.018 12.9,25.994 12.825,26.009 12.825,26.009 12.599,26.119 12.541,26.169 12.516,26.241 12.529,26.317 12.529,26.317 20.883,44.245 20.918,44.293 20.968,44.323 21.027,44.332 21.084,44.317 21.084,44.317 26.007,41.62 30.59,38.377
  Top Layer region: 28.3,38.185 28.339,38.142 28.359,38.086 28.356,38.028 28.33,37.975 28.33,37.975 17.354,23.418 17.294,23.37 17.218,23.359 17.147,23.387 17.147,23.387 16.944,23.534 16.895,23.594 16.882,23.669 16.909,23.742 16.909,23.742 26.703,37.738 26.751,37.845 26.753,37.963 26.71,38.072 26.629,38.156 26.629,38.156 24.657,39.459 22.621,40.661 22.621,40.661 22.509,40.697 22.393,40.687 22.289,40.634 22.213,40.544 22.213,40.544 13.782,25.344 13.744,25.197 13.783,25.05 13.889,24.941 13.889,24.941 15.501,23.973 15.647,23.93 15.795,23.964 15.907,24.067 15.907,24.067 25.162,38.326 25.203,38.368 25.258,38.391 25.317,38.391 25.371,38.369 25.371,38.369 26.07,37.897 26.112,37.855 26.134,37.8 26.133,37.741 26.109,37.687 26.109,37.687 15.759,22.914 15.703,22.866 15.631,22.85 15.559,22.872 15.559,22.872 12.89,24.476 12.838,24.529 12.817,24.6 12.833,24.672 12.833,24.672 21.712,42.11 21.749,42.156 21.8,42.185 21.858,42.191 21.915,42.175 21.915,42.175 25.187,40.307 28.3,38.185
  Top Layer region: 23.363,39.623 22.633,40.045 22.577,40.064 22.518,40.06 22.465,40.033 22.427,39.988 22.427,39.988 14.334,25.379 14.316,25.304 14.336,25.231 14.391,25.176 14.391,25.176 14.608,25.051 14.682,25.031 14.756,25.05 14.812,25.104 14.812,25.103 23.417,39.416 23.437,39.472 23.434,39.531 23.408,39.584 23.363,39.623
  Top Layer region: 9.976,44.904 9.151,45.079 9.092,45.08 9.037,45.057 8.995,45.016 8.972,44.961 8.972,44.961 5.79,28.566 5.796,28.49 5.838,28.426 5.906,28.391 5.906,28.391 6.152,28.339 6.229,28.343 6.293,28.384 6.329,28.452 6.329,28.452 10.091,44.723 10.092,44.782 10.071,44.837 10.03,44.88 9.976,44.904
  Top Layer region: 2.027,45.954 2.084,45.94 2.132,45.905 2.163,45.854 2.171,45.796 2.171,45.796 1.292,29.119 1.269,29.046 1.212,28.994 1.137,28.977 1.137,28.977 0.887,28.985 0.813,29.008 0.76,29.063 0.742,29.138 0.742,29.138 1.029,45.836 1.041,45.894 1.075,45.942 1.125,45.973 1.184,45.983 1.184,45.983
  Top Layer region: 8.402,45.224 7.572,45.371 7.513,45.369 7.459,45.345 7.418,45.302 7.398,45.247 7.398,45.247 4.79,28.751 4.798,28.675 4.842,28.612 4.912,28.58 4.912,28.58 5.159,28.536 5.236,28.543 5.299,28.586 5.332,28.655 5.332,28.655 8.524,45.048 8.523,45.107 8.5,45.162 8.458,45.203 8.402,45.224
  Top Layer region: 24.732,38.784 24.017,39.231 23.961,39.251 23.902,39.249 23.849,39.224 23.809,39.181 23.809,39.181 15.211,24.863 15.19,24.789 15.208,24.715 15.261,24.659 15.261,24.659 15.473,24.526 15.547,24.503 15.622,24.52 15.679,24.571 15.679,24.571 24.778,38.575 24.8,38.63 24.799,38.689 24.775,38.743 24.732,38.784
  Top Layer region: 16.128,43.078 15.335,43.367 15.277,43.376 15.22,43.361 15.172,43.326 15.142,43.275 15.142,43.275 9.71,27.483 9.704,27.406 9.737,27.337 9.8,27.293 9.8,27.293 10.036,27.207 10.113,27.2 10.182,27.232 10.227,27.294 10.227,27.294 16.217,42.884 16.227,42.942 16.213,43 16.178,43.047 16.128,43.078
  Top Layer region: 15.619,46.525 15.67,46.496 15.706,46.449 15.721,46.392 15.713,46.334 15.713,46.334 8.44,25.23 8.402,25.17 8.34,25.135 8.269,25.131 8.269,25.131 1.747,26.399 1.683,26.429 1.639,26.485 1.626,26.554 1.626,26.554 2.628,45.772 2.642,45.829 2.678,45.876 2.729,45.906 2.788,45.914 2.788,45.914 3.629,45.855 3.686,45.839 3.733,45.803 3.762,45.751 3.768,45.692 3.768,45.692 2.295,28.909 2.315,28.728 2.402,28.568 2.544,28.454 2.719,28.404 2.719,28.404 2.915,28.346 3.072,28.216 3.166,28.035 3.182,27.832 3.182,27.832 3.122,27.347 3.141,27.2 3.229,27.08 3.363,27.016 3.363,27.016 7.002,26.309 7.151,26.317 7.277,26.396 7.349,26.526 7.349,26.526 7.476,26.998 7.567,27.18 7.722,27.312 7.916,27.374 8.119,27.354 8.119,27.354 8.3,27.336 8.474,27.388 8.615,27.503 8.702,27.664 8.702,27.664 14.172,45.575 14.184,45.692 14.15,45.804 14.076,45.895 13.973,45.95 13.973,45.95 9.985,46.978 5.925,47.661 5.925,47.661 5.808,47.652 5.703,47.6 5.627,47.511 5.59,47.4 5.59,47.4 3.321,28.958 3.292,28.886 3.232,28.839 3.156,28.827 3.156,28.827 2.906,28.853 2.835,28.88 2.786,28.94 2.773,29.015 2.773,29.015 4.491,48.719 4.507,48.776 4.544,48.822 4.596,48.85 4.655,48.856 4.655,48.856 10.204,48.005 15.619,46.525
  Top Layer region: 13.533,45.562 13.585,45.534 13.622,45.489 13.64,45.432 13.634,45.374 13.634,45.374 8.299,27.941 8.258,27.876 8.191,27.839 8.114,27.841 8.114,27.841 7.873,27.91 7.807,27.949 7.769,28.016 7.769,28.093 7.769,28.093 12.186,44.595 12.193,44.712 12.156,44.823 12.078,44.911 11.973,44.963 11.973,44.963 9.674,45.513 7.35,45.946 7.35,45.946 7.233,45.941 7.126,45.892 7.047,45.806 7.006,45.696 7.006,45.696 4.282,28.529 4.297,28.378 4.384,28.254 4.521,28.188 4.521,28.188 6.367,27.829 6.519,27.839 6.646,27.921 6.717,28.056 6.717,28.056 10.536,44.62 10.56,44.674 10.604,44.714 10.659,44.735 10.718,44.732 10.718,44.732 11.537,44.528 11.59,44.503 11.63,44.459 11.649,44.403 11.645,44.344 11.645,44.344 6.972,26.922 6.936,26.858 6.873,26.818 6.798,26.814 6.798,26.814 3.741,27.408 3.674,27.44 3.631,27.5 3.621,27.574 3.621,27.574 6,46.996 6.019,47.052 6.057,47.097 6.11,47.123 6.169,47.127 6.169,47.127 9.882,46.49 13.533,45.562
  Top Layer region: 17.622,42.489 17.671,42.457 17.704,42.407 17.715,42.349 17.703,42.291 17.703,42.291 11.174,26.921 11.127,26.86 11.056,26.831 10.979,26.84 10.979,26.84 10.747,26.934 10.685,26.98 10.655,27.051 10.663,27.127 10.663,27.127 16.643,42.72 16.675,42.77 16.724,42.804 16.781,42.816 16.84,42.805 16.84,42.805
  Top Layer region: 35.506,29.243 34.964,29.889 34.918,29.926 34.861,29.942 34.802,29.935 34.751,29.906 34.751,29.906 22.15,18.946 22.107,18.882 22.101,18.806 22.134,18.736 22.134,18.736 22.295,18.544 22.358,18.5 22.434,18.492 22.504,18.524 22.504,18.524 35.486,29.03 35.524,29.075 35.541,29.132 35.535,29.191 35.506,29.243
  Top Layer region: 41.871,25.6 41.891,25.545 41.889,25.487 41.864,25.433 41.82,25.394 41.82,25.394 22.683,13.902 22.615,13.881 22.545,13.893 22.489,13.936 22.489,13.936 18.307,19.1 18.277,19.164 18.28,19.235 18.314,19.297 18.314,19.297 31.435,33.374 31.483,33.409 31.54,33.422 31.599,33.412 31.648,33.38 31.648,33.38 32.255,32.794 32.289,32.745 32.301,32.688 32.29,32.629 32.257,32.58 32.257,32.58 20.34,20.67 20.239,20.519 20.204,20.34 20.239,20.162 20.341,20.01 20.341,20.01 20.453,19.841 20.49,19.64 20.446,19.441 20.328,19.275 20.328,19.275 19.97,18.942 19.89,18.817 19.88,18.669 19.942,18.534 19.942,18.534 22.275,15.653 22.394,15.564 22.541,15.543 22.68,15.596 22.68,15.596 23.08,15.876 23.267,15.957 23.471,15.959 23.659,15.881 23.802,15.736 23.802,15.736 23.929,15.605 24.097,15.533 24.279,15.531 24.448,15.598 24.448,15.598 40.152,25.803 40.236,25.885 40.282,25.993 40.283,26.11 40.24,26.218 40.24,26.218 37.846,29.569 35.175,32.702 35.175,32.702 35.08,32.77 34.966,32.797 34.85,32.779 34.75,32.717 34.75,32.717 21.157,20.048 21.09,20.012 21.013,20.014 20.947,20.054 20.947,20.054 20.773,20.234 20.735,20.302 20.736,20.378 20.775,20.445 20.775,20.445 34.757,34.435 34.805,34.467 34.863,34.479 34.921,34.467 34.97,34.434 34.97,34.434 38.673,30.215 41.871,25.6
  Top Layer region: 39.653,26.203 39.675,26.149 39.675,26.09 39.652,26.036 39.61,25.995 39.61,25.995 24.317,16.07 24.244,16.046 24.169,16.061 24.111,16.112 24.111,16.112 23.971,16.32 23.946,16.392 23.96,16.468 24.009,16.527 24.009,16.527 38,26.329 38.081,26.414 38.124,26.523 38.121,26.64 38.074,26.747 38.074,26.747 36.666,28.647 35.164,30.472 35.164,30.472 35.071,30.544 34.958,30.575 34.842,30.56 34.74,30.502 34.74,30.502 21.619,19.102 21.533,18.977 21.52,18.825 21.582,18.687 21.582,18.687 22.766,17.225 22.888,17.135 23.039,17.117 23.179,17.175 23.179,17.175 36.752,27.409 36.806,27.434 36.865,27.437 36.92,27.417 36.964,27.377 36.964,27.377 37.46,26.695 37.484,26.641 37.486,26.582 37.465,26.527 37.424,26.484 37.424,26.484 22.646,16.142 22.577,16.116 22.503,16.126 22.444,16.171 22.444,16.171 20.484,18.591 20.453,18.659 20.458,18.733 20.498,18.795 20.498,18.795 34.805,32.144 34.855,32.175 34.913,32.185 34.971,32.171 35.018,32.136 35.018,32.136 37.453,29.262 39.653,26.203
  Top Layer region: 40.045,22.633 39.623,23.363 39.584,23.408 39.531,23.434 39.472,23.437 39.416,23.417 39.416,23.417 25.103,14.812 25.05,14.756 25.031,14.682 25.051,14.608 25.051,14.608 25.176,14.391 25.23,14.336 25.304,14.316 25.379,14.334 25.379,14.334 39.988,22.427 40.033,22.465 40.06,22.518 40.064,22.577 40.045,22.633
  Top Layer region: 36.505,27.986 35.986,28.65 35.941,28.689 35.885,28.707 35.826,28.702 35.773,28.675 35.773,28.675 22.798,18.161 22.753,18.099 22.744,18.023 22.774,17.952 22.774,17.952 22.929,17.755 22.99,17.708 23.066,17.698 23.137,17.727 23.137,17.727 36.477,27.774 36.517,27.818 36.536,27.874 36.532,27.933 36.505,27.986
  Top Layer region: 29.889,34.964 29.243,35.506 29.191,35.535 29.132,35.541 29.075,35.524 29.03,35.486 29.03,35.486 18.524,22.504 18.492,22.434 18.5,22.358 18.544,22.295 18.544,22.295 18.736,22.134 18.806,22.101 18.882,22.107 18.946,22.15 18.946,22.15 29.906,34.751 29.935,34.802 29.942,34.861 29.926,34.918 29.889,34.964
  Top Layer region: 31.091,33.9 31.126,33.852 31.14,33.795 31.131,33.736 31.1,33.686 31.1,33.686 19.707,21.475 19.642,21.435 19.565,21.431 19.497,21.466 19.497,21.466 19.311,21.634 19.269,21.698 19.264,21.775 19.298,21.844 19.298,21.844 30.251,34.451 30.298,34.487 30.355,34.502 30.413,34.494 30.464,34.464 30.464,34.464
  Top Layer region: -26.888,-39.061 -25.129,-40.215 -23.321,-41.29 -23.321,-41.29 -23.265,-41.308 -23.207,-41.304 -23.154,-41.277 -23.116,-41.232 -23.116,-41.232 -14.334,-25.379 -14.316,-25.304 -14.336,-25.231 -14.391,-25.176 -14.391,-25.176 -14.608,-25.051 -14.682,-25.031 -14.756,-25.05 -14.812,-25.104 -14.812,-25.103 -23.581,-39.689 -23.66,-39.776 -23.766,-39.825 -23.883,-39.831 -23.993,-39.791 -23.993,-39.791 -24.623,-39.405 -25.246,-39.008 -25.246,-39.008 -25.33,-38.926 -25.377,-38.819 -25.378,-38.702 -25.335,-38.593 -25.335,-38.593 -15.907,-24.067 -15.795,-23.964 -15.647,-23.93 -15.501,-23.973 -15.501,-23.973 -13.889,-24.941 -13.783,-25.05 -13.744,-25.197 -13.782,-25.344 -13.782,-25.344 -22.027,-40.209 -22.045,-40.266 -22.04,-40.325 -22.012,-40.377 -21.966,-40.414 -21.966,-40.414 -21.222,-40.81 -21.165,-40.827 -21.106,-40.821 -21.054,-40.792 -21.018,-40.746 -21.018,-40.746 -12.833,-24.672 -12.817,-24.6 -12.838,-24.529 -12.89,-24.476 -12.89,-24.476 -15.559,-22.872 -15.631,-22.85 -15.703,-22.866 -15.759,-22.914 -15.759,-22.914 -26.926,-38.852 -26.949,-38.906 -26.951,-38.964 -26.929,-39.019 -26.888,-39.061
  Top Layer region: -27.377,-36.964 -26.695,-37.46 -26.641,-37.484 -26.582,-37.486 -26.527,-37.465 -26.484,-37.424 -26.484,-37.424 -16.909,-23.742 -16.882,-23.669 -16.895,-23.594 -16.944,-23.534 -16.944,-23.534 -17.147,-23.387 -17.218,-23.359 -17.294,-23.37 -17.354,-23.418 -17.354,-23.418 -27.409,-36.752 -27.434,-36.806 -27.437,-36.865 -27.417,-36.92 -27.377,-36.964
  Top Layer region: -24.732,-38.784 -24.017,-39.231 -23.961,-39.251 -23.902,-39.249 -23.849,-39.224 -23.809,-39.181 -23.809,-39.181 -15.211,-24.863 -15.19,-24.789 -15.208,-24.715 -15.261,-24.659 -15.261,-24.659 -15.473,-24.526 -15.547,-24.503 -15.622,-24.52 -15.679,-24.571 -15.679,-24.571 -24.778,-38.575 -24.8,-38.63 -24.799,-38.689 -24.775,-38.743 -24.732,-38.784
  Top Layer region: -32.975,-38.51 -33.011,-38.464 -33.027,-38.407 -33.02,-38.349 -32.99,-38.297 -32.99,-38.297 -18.946,-22.15 -18.882,-22.107 -18.806,-22.101 -18.736,-22.134 -18.736,-22.134 -18.544,-22.295 -18.5,-22.358 -18.492,-22.434 -18.524,-22.504 -18.524,-22.504 -31.198,-38.165 -31.253,-38.269 -31.263,-38.385 -31.228,-38.497 -31.153,-38.587 -31.153,-38.587 -26.28,-42.058 -21.025,-44.916 -21.025,-44.916 -20.911,-44.944 -20.796,-44.926 -20.695,-44.866 -20.626,-44.771 -20.626,-44.771 -12.044,-26.381 -12.001,-26.204 -12.029,-26.024 -12.123,-25.868 -12.27,-25.761 -12.27,-25.761 -12.434,-25.639 -12.537,-25.464 -12.564,-25.262 -12.509,-25.065 -12.509,-25.065 -12.287,-24.63 -12.255,-24.485 -12.296,-24.342 -12.4,-24.237 -12.4,-24.237 -15.578,-22.327 -15.721,-22.285 -15.866,-22.315 -15.979,-22.412 -15.979,-22.412 -16.259,-22.813 -16.406,-22.953 -16.597,-23.024 -16.801,-23.015 -16.985,-22.928 -16.985,-22.928 -17.149,-22.848 -17.331,-22.838 -17.503,-22.898 -17.638,-23.019 -17.638,-23.019 -28.905,-37.98 -28.956,-38.085 -28.963,-38.202 -28.924,-38.313 -28.846,-38.4 -28.846,-38.4 -25.451,-40.73 -21.869,-42.76 -21.869,-42.76 -21.756,-42.792 -21.64,-42.778 -21.537,-42.721 -21.465,-42.629 -21.465,-42.629 -13.024,-26.076 -12.973,-26.018 -12.9,-25.994 -12.825,-26.009 -12.825,-26.009 -12.599,-26.119 -12.541,-26.169 -12.516,-26.241 -12.529,-26.317 -12.529,-26.317 -20.883,-44.245 -20.918,-44.293 -20.968,-44.323 -21.027,-44.332 -21.084,-44.317 -21.084,-44.317 -26.007,-41.62 -30.59,-38.377 -30.59,-38.377 -30.628,-38.332 -30.645,-38.276 -30.64,-38.218 -30.613,-38.166 -30.613,-38.166 -16.56,-20.822 -16.504,-20.779 -16.434,-20.766 -16.366,-20.787 -16.366,-20.787 -10.671,-24.21 -10.62,-24.259 -10.599,-24.327 -10.61,-24.397 -10.61,-24.397 -19.959,-46.44 -19.993,-46.489 -20.042,-46.521 -20.1,-46.531 -20.157,-46.519 -20.157,-46.519 -26.866,-42.995 -32.975,-38.51
  Top Layer region: -17.622,-42.489 -17.671,-42.457 -17.704,-42.407 -17.715,-42.349 -17.703,-42.291 -17.703,-42.291 -11.174,-26.921 -11.127,-26.86 -11.056,-26.831 -10.979,-26.84 -10.979,-26.84 -10.747,-26.934 -10.685,-26.98 -10.655,-27.051 -10.663,-27.127 -10.663,-27.127 -16.643,-42.72 -16.675,-42.77 -16.724,-42.804 -16.781,-42.816 -16.84,-42.805 -16.84,-42.805
  Top Layer region: -11.907,-45.902 -9.859,-46.385 -7.793,-46.776 -7.793,-46.776 -7.734,-46.774 -7.68,-46.75 -7.64,-46.707 -7.62,-46.652 -7.62,-46.652 -4.79,-28.751 -4.798,-28.675 -4.842,-28.612 -4.912,-28.58 -4.912,-28.58 -5.159,-28.536 -5.236,-28.543 -5.299,-28.586 -5.332,-28.655 -5.332,-28.655 -8.584,-45.36 -8.629,-45.469 -8.711,-45.552 -8.819,-45.597 -8.937,-45.598 -8.937,-45.598 -9.661,-45.45 -10.382,-45.29 -10.382,-45.29 -10.489,-45.242 -10.569,-45.157 -10.611,-45.048 -10.607,-44.93 -10.607,-44.93 -6.717,-28.056 -6.646,-27.921 -6.519,-27.839 -6.367,-27.829 -6.367,-27.829 -4.521,-28.188 -4.384,-28.254 -4.297,-28.378 -4.282,-28.529 -4.282,-28.529 -6.946,-45.318 -6.944,-45.377 -6.919,-45.431 -6.875,-45.47 -6.819,-45.49 -6.819,-45.49 -5.984,-45.607 -5.925,-45.604 -5.872,-45.578 -5.833,-45.533 -5.814,-45.477 -5.814,-45.477 -3.621,-27.574 -3.631,-27.5 -3.674,-27.44 -3.741,-27.408 -3.741,-27.408 -6.798,-26.814 -6.873,-26.818 -6.936,-26.858 -6.972,-26.922 -6.972,-26.922 -12.014,-45.718 -12.018,-45.777 -11.999,-45.832 -11.96,-45.876 -11.907,-45.902
  Top Layer region: -17.815,-47.465 -17.865,-47.434 -17.899,-47.387 -17.912,-47.329 -17.902,-47.271 -17.902,-47.271 -10.227,-27.294 -10.182,-27.232 -10.113,-27.2 -10.036,-27.207 -10.036,-27.207 -9.8,-27.293 -9.737,-27.337 -9.704,-27.406 -9.71,-27.483 -9.71,-27.483 -16.264,-46.534 -16.279,-46.65 -16.249,-46.763 -16.178,-46.856 -16.077,-46.915 -16.077,-46.915 -10.311,-48.51 -4.395,-49.398 -4.395,-49.398 -4.278,-49.386 -4.176,-49.329 -4.102,-49.238 -4.069,-49.126 -4.069,-49.126 -2.295,-28.909 -2.315,-28.728 -2.402,-28.568 -2.544,-28.454 -2.719,-28.404 -2.719,-28.404 -2.915,-28.346 -3.072,-28.216 -3.166,-28.035 -3.182,-27.832 -3.182,-27.832 -3.122,-27.347 -3.141,-27.2 -3.229,-27.08 -3.363,-27.016 -3.363,-27.016 -7.002,-26.309 -7.151,-26.317 -7.277,-26.396 -7.349,-26.526 -7.349,-26.526 -7.476,-26.998 -7.567,-27.18 -7.722,-27.312 -7.916,-27.374 -8.119,-27.354 -8.119,-27.354 -8.3,-27.336 -8.474,-27.388 -8.615,-27.503 -8.702,-27.664 -8.702,-27.664 -14.172,-45.575 -14.184,-45.692 -14.15,-45.804 -14.076,-45.895 -13.973,-45.95 -13.973,-45.95 -9.986,-46.978 -5.925,-47.661 -5.925,-47.661 -5.808,-47.652 -5.703,-47.6 -5.627,-47.511 -5.59,-47.4 -5.59,-47.4 -3.321,-28.958 -3.292,-28.886 -3.232,-28.839 -3.156,-28.827 -3.156,-28.827 -2.906,-28.853 -2.835,-28.88 -2.786,-28.94 -2.773,-29.015 -2.773,-29.015 -4.491,-48.719 -4.507,-48.776 -4.544,-48.822 -4.596,-48.85 -4.655,-48.856 -4.655,-48.856 -10.204,-48.005 -15.619,-46.525 -15.619,-46.525 -15.67,-46.496 -15.706,-46.449 -15.721,-46.392 -15.713,-46.334 -15.713,-46.334 -8.44,-25.23 -8.402,-25.17 -8.34,-25.135 -8.269,-25.131 -8.269,-25.131 -1.747,-26.399 -1.683,-26.429 -1.639,-26.485 -1.626,-26.554 -1.626,-26.554 -2.872,-50.466 -2.887,-50.523 -2.922,-50.57 -2.973,-50.6 -3.031,-50.608 -3.031,-50.608 -10.541,-49.591 -17.815,-47.465
  Top Layer region: -9.976,-44.904 -9.151,-45.079 -9.092,-45.08 -9.037,-45.057 -8.995,-45.016 -8.972,-44.961 -8.972,-44.961 -5.79,-28.566 -5.796,-28.49 -5.838,-28.426 -5.906,-28.391 -5.906,-28.391 -6.152,-28.339 -6.229,-28.343 -6.293,-28.384 -6.329,-28.452 -6.329,-28.452 -10.091,-44.723 -10.092,-44.782 -10.071,-44.837 -10.03,-44.88 -9.976,-44.904
  Top Layer region: -13.084,-44.098 -12.273,-44.331 -12.214,-44.336 -12.158,-44.317 -12.113,-44.278 -12.087,-44.225 -12.087,-44.225 -7.769,-28.093 -7.769,-28.016 -7.807,-27.949 -7.873,-27.91 -7.873,-27.91 -8.114,-27.841 -8.191,-27.839 -8.258,-27.876 -8.299,-27.941 -8.299,-27.941 -13.186,-43.91 -13.192,-43.969 -13.174,-44.026 -13.136,-44.071 -13.084,-44.098
  Top Layer region: -2.027,-45.954 -2.084,-45.94 -2.132,-45.905 -2.163,-45.854 -2.171,-45.796 -2.171,-45.796 -1.292,-29.119 -1.269,-29.046 -1.212,-28.994 -1.137,-28.977 -1.137,-28.977 -0.887,-28.985 -0.813,-29.008 -0.76,-29.063 -0.742,-29.138 -0.742,-29.138 -1.029,-45.836 -1.041,-45.894 -1.075,-45.942 -1.125,-45.973 -1.184,-45.983 -1.184,-45.983
  Top Layer region: -36.505,-27.986 -35.986,-28.65 -35.941,-28.689 -35.885,-28.707 -35.826,-28.702 -35.773,-28.675 -35.773,-28.675 -22.798,-18.161 -22.753,-18.099 -22.744,-18.023 -22.774,-17.952 -22.774,-17.952 -22.929,-17.755 -22.99,-17.708 -23.066,-17.698 -23.137,-17.727 -23.137,-17.727 -36.477,-27.774 -36.517,-27.818 -36.536,-27.874 -36.532,-27.933 -36.505,-27.986
  Top Layer region: -38.626,-27.509 -37.368,-29.195 -36.037,-30.824 -36.037,-30.824 -35.991,-30.86 -35.934,-30.876 -35.875,-30.869 -35.824,-30.839 -35.824,-30.839 -22.15,-18.946 -22.107,-18.882 -22.101,-18.806 -22.134,-18.736 -22.134,-18.736 -22.295,-18.544 -22.358,-18.5 -22.434,-18.492 -22.504,-18.524 -22.504,-18.524 -35.733,-29.23 -35.837,-29.285 -35.954,-29.295 -36.065,-29.26 -36.155,-29.185 -36.155,-29.185 -36.615,-28.607 -37.065,-28.021 -37.065,-28.021 -37.116,-27.915 -37.123,-27.798 -37.085,-27.688 -37.007,-27.6 -37.007,-27.6 -23.179,-17.175 -23.039,-17.117 -22.888,-17.135 -22.766,-17.225 -22.766,-17.225 -21.582,-18.687 -21.52,-18.825 -21.533,-18.977 -21.619,-19.102 -21.619,-19.102 -34.451,-30.251 -34.487,-30.298 -34.502,-30.355 -34.494,-30.413 -34.464,-30.464 -34.464,-30.464 -33.9,-31.091 -33.852,-31.126 -33.795,-31.14 -33.736,-31.131 -33.686,-31.1 -33.686,-31.1 -20.498,-18.795 -20.458,-18.733 -20.453,-18.659 -20.484,-18.591 -20.484,-18.591 -22.444,-16.171 -22.503,-16.126 -22.577,-16.116 -22.646,-16.142 -22.646,-16.142 -38.59,-27.3 -38.631,-27.342 -38.652,-27.397 -38.65,-27.456 -38.626,-27.509
  Top Layer region: -38.369,-25.371 -37.897,-26.07 -37.855,-26.112 -37.8,-26.134 -37.741,-26.133 -37.687,-26.109 -37.687,-26.109 -24.009,-16.527 -23.96,-16.468 -23.946,-16.392 -23.971,-16.32 -23.971,-16.32 -24.111,-16.112 -24.169,-16.061 -24.244,-16.046 -24.317,-16.07 -24.317,-16.07 -38.326,-25.162 -38.368,-25.203 -38.391,-25.258 -38.391,-25.317 -38.369,-25.371
  Top Layer region: -44.157,-24.909 -44.176,-24.853 -44.171,-24.795 -44.144,-24.742 -44.099,-24.704 -44.099,-24.704 -25.379,-14.334 -25.304,-14.316 -25.231,-14.336 -25.176,-14.391 -25.176,-14.391 -25.051,-14.608 -25.031,-14.682 -25.05,-14.756 -25.104,-14.812 -25.104,-14.812 -42.37,-25.193 -42.457,-25.272 -42.506,-25.378 -42.512,-25.495 -42.472,-25.605 -42.472,-25.605 -39.08,-30.533 -35.119,-35.016 -35.119,-35.016 -35.022,-35.081 -34.907,-35.104 -34.792,-35.082 -34.695,-35.017 -34.695,-35.017 -20.34,-20.67 -20.239,-20.519 -20.204,-20.34 -20.239,-20.162 -20.341,-20.01 -20.341,-20.01 -20.453,-19.841 -20.49,-19.64 -20.446,-19.441 -20.328,-19.275 -20.328,-19.275 -19.97,-18.942 -19.89,-18.817 -19.88,-18.669 -19.942,-18.534 -19.942,-18.534 -22.275,-15.653 -22.394,-15.564 -22.541,-15.543 -22.68,-15.596 -22.68,-15.596 -23.08,-15.876 -23.267,-15.957 -23.471,-15.959 -23.659,-15.881 -23.802,-15.736 -23.802,-15.736 -23.929,-15.605 -24.097,-15.533 -24.279,-15.531 -24.448,-15.598 -24.448,-15.598 -40.152,-25.803 -40.236,-25.885 -40.282,-25.993 -40.283,-26.11 -40.24,-26.218 -40.24,-26.218 -37.846,-29.569 -35.175,-32.702 -35.175,-32.702 -35.08,-32.77 -34.966,-32.797 -34.85,-32.779 -34.75,-32.717 -34.75,-32.717 -21.157,-20.048 -21.09,-20.012 -21.013,-20.014 -20.947,-20.054 -20.947,-20.054 -20.773,-20.234 -20.735,-20.302 -20.736,-20.378 -20.775,-20.445 -20.775,-20.445 -34.757,-34.435 -34.805,-34.467 -34.863,-34.479 -34.921,-34.467 -34.97,-34.434 -34.97,-34.434 -38.673,-30.215 -41.871,-25.6 -41.871,-25.6 -41.891,-25.545 -41.889,-25.487 -41.864,-25.433 -41.82,-25.394 -41.82,-25.394 -22.683,-13.902 -22.615,-13.881 -22.545,-13.893 -22.489,-13.936 -22.489,-13.936 -18.307,-19.1 -18.277,-19.164 -18.28,-19.235 -18.314,-19.297 -18.314,-19.297 -34.639,-36.813 -34.687,-36.847 -34.744,-36.861 -34.802,-36.851 -34.852,-36.82 -34.852,-36.82 -39.951,-31.213 -44.157,-24.909
  Top Layer region: -31.091,-33.9 -31.126,-33.852 -31.14,-33.795 -31.131,-33.736 -31.1,-33.686 -31.1,-33.686 -19.707,-21.475 -19.642,-21.435 -19.565,-21.431 -19.497,-21.466 -19.497,-21.466 -19.311,-21.634 -19.269,-21.698 -19.264,-21.775 -19.298,-21.844 -19.298,-21.844 -30.251,-34.451 -30.298,-34.487 -30.355,-34.502 -30.413,-34.494 -30.464,-34.464 -30.464,-34.464
  Top Layer region: -47.272,3.755 -47.392,1.655 -47.419,-0.448 -47.419,-0.448 -47.407,-0.506 -47.374,-0.554 -47.324,-0.586 -47.266,-0.597 -47.266,-0.597 -29.146,-0.275 -29.072,-0.254 -29.018,-0.2 -28.999,-0.125 -28.999,-0.125 -28.999,0.125 -29.018,0.2 -29.072,0.254 -29.146,0.275 -29.146,0.275 -46.162,0.577 -46.276,0.602 -46.373,0.669 -46.436,0.768 -46.457,0.883 -46.457,0.883 -46.437,1.622 -46.405,2.36 -46.405,2.36 -46.376,2.473 -46.306,2.567 -46.206,2.627 -46.09,2.644 -46.09,2.644 -28.796,1.743 -28.651,1.697 -28.548,1.586 -28.512,1.438 -28.512,1.438 -28.545,-0.442 -28.586,-0.588 -28.693,-0.696 -28.839,-0.737 -28.839,-0.737 -45.836,-1.029 -45.894,-1.041 -45.942,-1.075 -45.973,-1.125 -45.983,-1.184 -45.983,-1.184 -45.954,-2.027 -45.94,-2.084 -45.905,-2.132 -45.854,-2.163 -45.796,-2.171 -45.796,-2.171 -27.784,-1.222 -27.713,-1.2 -27.661,-1.147 -27.642,-1.075 -27.642,-1.075 -27.587,2.039 -27.604,2.111 -27.654,2.166 -27.724,2.191 -27.724,2.191 -47.109,3.893 -47.168,3.886 -47.219,3.858 -47.256,3.812 -47.272,3.755
  Top Layer region: -45.7,5.227 -45.789,4.389 -45.783,4.33 -45.755,4.277 -45.709,4.24 -45.652,4.223 -45.652,4.223 -29.015,2.773 -28.94,2.786 -28.88,2.835 -28.853,2.906 -28.853,2.906 -28.827,3.156 -28.839,3.232 -28.886,3.292 -28.958,3.321 -28.958,3.321 -45.533,5.36 -45.592,5.356 -45.645,5.329 -45.683,5.284 -45.7,5.227
  Top Layer region: -45.954,2.027 -45.983,1.184 -45.973,1.125 -45.942,1.075 -45.894,1.041 -45.836,1.029 -45.836,1.029 -29.138,0.742 -29.063,0.76 -29.008,0.813 -28.985,0.887 -28.985,0.887 -28.977,1.137 -28.994,1.212 -29.046,1.269 -29.119,1.292 -29.119,1.292 -45.796,2.171 -45.854,2.163 -45.905,2.132 -45.94,2.084 -45.954,2.027